# Altium PCB 220v-5v.PcbDoc
Units mm, origin at the board's own origin, x right, y up, seen from the top; angles counter-clockwise.
Board outline 48.03 x 13.67 mm, 2 copper layers (Top Layer, Bottom Layer); 15 components, 17 nets, 33 pads, 0 vias.
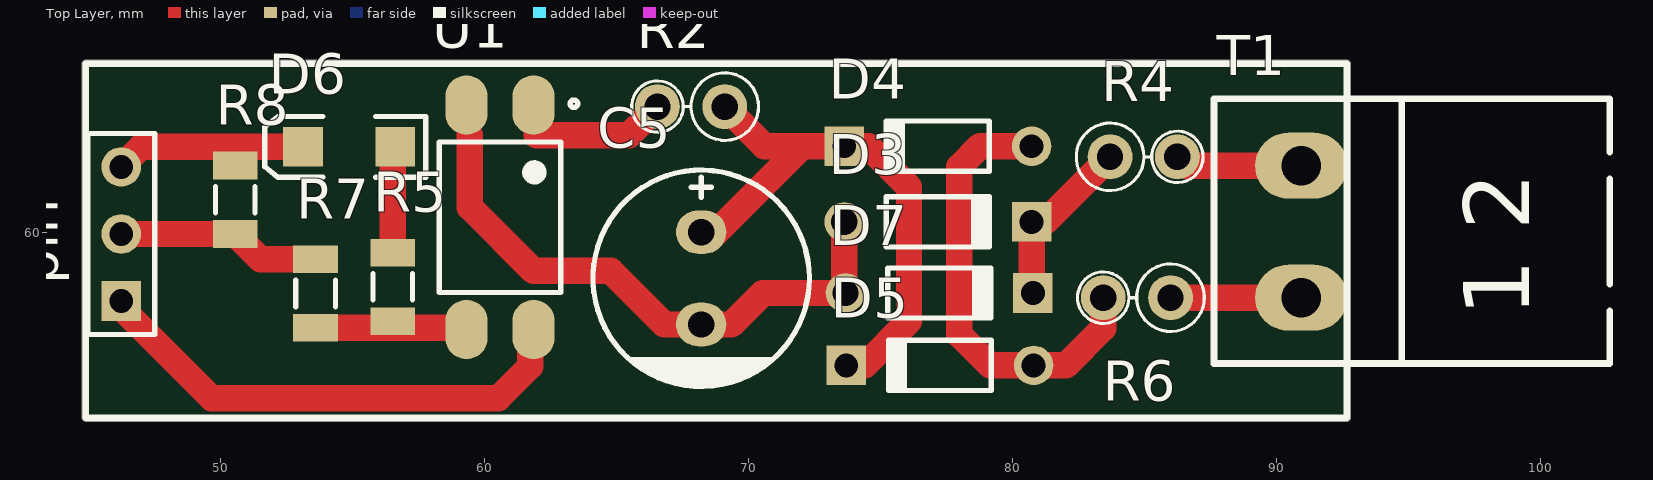
[diagram p0: Top Layer view]
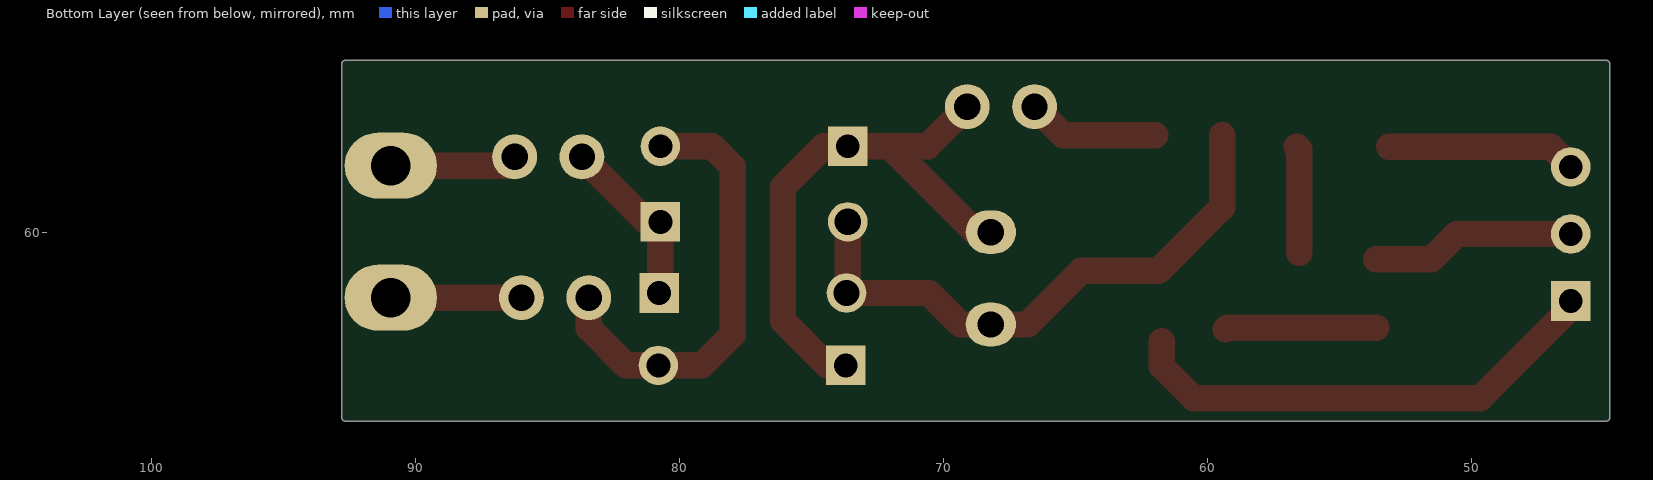
[diagram p1: Bottom Layer view, seen from below]
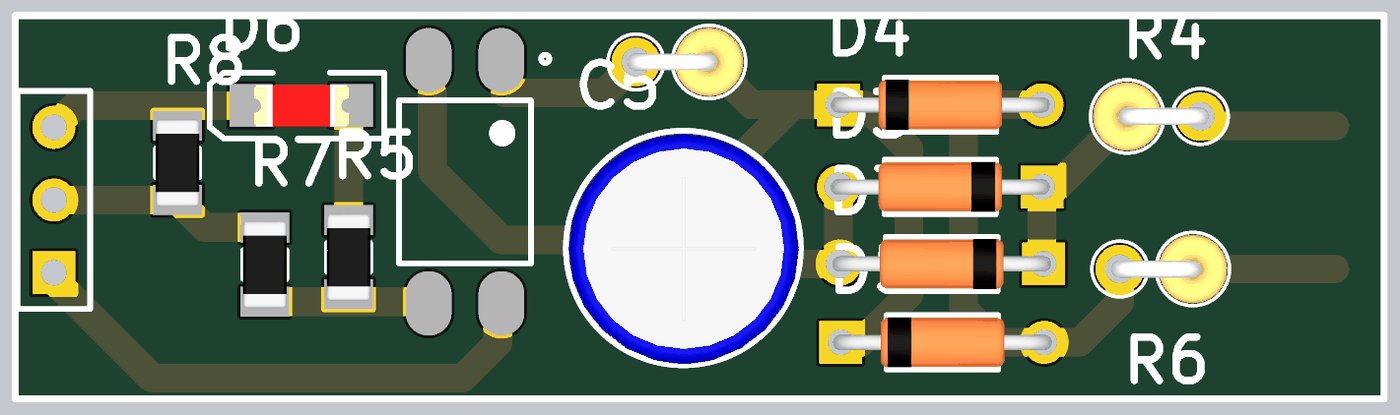
[diagram p2: 3D render of the assembled board from above, using the file's embedded part models]

## Layer stack, top to bottom
Top Solder: solder mask 0.0102, Solder Resist, Dk 3.5
Top Layer: signal copper 0.0356
Dielectric 1: dielectric 0.32, FR-4, Dk 4.8
Bottom Layer: signal copper 0.0356
Bottom Solder: solder mask 0.0102, Solder Resist, Dk 3.5

## Board outline
44.882,52.857 cw(c44.882,52.984) 44.754,52.984 44.754,66.396 cw(c44.882,66.396) 44.882,66.523 92.659,66.523 cw(c92.659,66.396) 92.787,66.396 92.787,52.984 cw(c92.659,52.984) 92.659,52.857

## Design rules (kind name [scope] priority, off if disabled: settings)
Clearance [All] p1: gap=0.254 ignorepadtopadclearanceinfootprint=FALSE except(0: Arc-Hole Track-Hole SMDPad-Hole THPad-Hole Via-Hole Fill-Hole Poly-Hole Region-Hole Text-Hole)
PolygonConnect [All] p1: connectstyle=Relief reliefconductorwidth=0.254 reliefentries=4 polygonreliefangle="90 Angle" airgapwidth=0.254
RoutingVias [All] p1: holewidth=0.711 width=1.27 viastyle="Through Hole" minholewidth=0.711 minwidth=1.27 maxholewidth=0.711 maxwidth=1.27
SolderMaskExpansion [All] p1: expansion=0.102
Width [All] p1: maxlimit=1 minlimit=0.4 preferedwidth=0.6
30 further rules are at their usual default settings.

## Components (designator, comment, footprint, x,y, rotation, side; value= is the part's Value field where it differs from the comment)
C5 "1uF" "cap 03" 68.199,58.265 r90 top
D3 "1N4148" DO-35#1 77.165,60.401 r0 top
D4 "1N4148" DO-35#2 77.165,63.271 r180 top
D5 "1N4148" DO-35#2 77.241,54.966 r180 top
D6 "SMD 1206 LED" "LED 1206" 54.864,63.246 r180 top
D7 "1N4148" DO-35#1 77.216,57.709 r0 top
pin "Comment" HDR1X3 46.228,57.404 r90 top
R2 "1K" "Axial 0_25w_2_54mm" 67.818,64.77 r180 top
R4 "1K" "Axial 0_25w_2_54mm" 84.963,62.865 r0 top
R5 "1K" "RES 1206 (3216X08L)" 56.515,56.642 r90 top
R6 "1K" "Axial 0_25w_2_54mm" 84.704,57.531 r180 top
R7 "1K" "RES 1206 (3216X08L)" 53.594,56.388 r90 top (schematic designator R5)
R8 "1K" "RES 1206 (3216X08L)" 50.546,59.944 r90 top (schematic designator R5)
T1 "Phoenix terminal" "phoenix terminal 2" 102.616,55.038 r90 top
U1 "PC817X2NIP0F" SOT254P975X400-4N 60.579,60.579 r270 top

## Footprints (in the part's own frame and the unit in brackets; to place one, negate y for a bottom-side part, rotate by r counter-clockwise, add the part's x,y. Pads: shape width x height; smd on the part's side, far side on the other; paste and mask are expansions set on the pad)
"Axial 0_25w_2_54mm" [mm] "Designer Abbas Basereh"
  round 1.7 hole 1: 1(1.275,0) 2(-1.275,0)
  silkscreen extent -2.56,-1.28 2.25,1.28, body extent -2.47,-1.2 1.57,1.2, height 9.4
"cap 03" [mm]
  oval 1.651x1.905 hole 1: 1(1.75,0) 2(-1.75,0)
  silkscreen extent -4.1,-4.1 4.1,4.1, body extent -4.05,-4.04 4,4.01, height 12.03
DO-35#1 [mm] "Diode, Axial; Body 3.8 x 1.9 mm (LxDia. max), Lead Dia. 0.53 mm (max)"
  round 1.5 hole 1: 1(-3.55,0)
  rect 1.5x1.5 hole 0.9: 2(3.55,0)
  silkscreen extent -1.95,-0.95 2.05,0.95, body extent -3.82,-0.87 3.82,0.87, height 1.89
DO-35#2 [mm] "Diode, Axial; Body 3.8 x 1.9 mm (LxDia. max), Lead Dia. 0.53 mm (max)"
  round 1.5 hole 0.9: 1(-3.55,0)
  rect 1.5x1.5 hole 0.9: 2(3.55,0)
  silkscreen extent -1.95,-0.95 2.05,0.95, body extent -3.82,-0.87 3.82,0.87, height 1.89
HDR1X3 [mm] "Connector; Header; 3 Position"
  rect 1.5x1.5 hole 0.9: 1(0,0)
  round 1.5 hole 0.9: 2(2.54,0) 3(5.08,0)
  silkscreen extent -1.27,-1.27 6.35,1.27
"LED 1206" [mm]
  rect 1.5x1.5 smd: 1(-1.75,0) 2(1.75,0)
  silkscreen extent -2.9,-1.15 3.2,1.15, body extent -1.65,-0.72 1.65,0.73, height 1.36
"phoenix terminal 2" [mm] "2 terminals"
  oval 2.5x3.5 hole 1.5: 1(2.493,11.684) 2(7.493,11.684)
  silkscreen extent 0,0 10.03,15
"RES 1206 (3216X08L)" [mm] "Chip Resistor, 2-Leads, Body 3.2x1.6mm, IPC High Density _ (0.125 W)"
  rect 1.05x1.7 smd: 1(0,0) 2(2.596,0)
  silkscreen extent 0.8,-0.75 1.8,0.75, body extent -0.23,-0.76 2.82,0.76, height 0.6
SOT254P975X400-4N [mm]
  oval 2.25x1.6 smd: 1(-4.25,1.27) 2(-4.25,-1.27) 3(4.25,-1.27) 4(4.25,1.27)
  silkscreen extent -4.44,-2.3 2.85,2.94

## Part data
C5: library part Cap-Polar, "Polar Capacitor", Voltage=16V, Adding Date=1387/12/20, Designer="Saeid Jorablo", Organazation=ControTec
D3 D4 D5 D7: library part "Diode 1N4148", "High Conductance Fast Diode", Code_JEDEC=DO-204-AH, ComponentLink1Description="Manufacturer Link", ComponentLink1URL=http://www.fairchildsemi.com/, ComponentLink2Description=Datasheet, ComponentLink2URL=http://www.fairchildsemi.com/ds/1N%2F1N4148.pdf, DatasheetVersion=1997, LatestRevisionDate=17-Jul-2002, LatestRevisionNote="Re-released for DXP Platform.", PackageDescription="Diode, Axial; Body 3.8 x 1.9 mm (LxDia. max), Lead Dia. 0.53 mm (max)", PackageReference=DO-35, Published=8-Jun-2000, Publisher="Altium Limited"
D6: library part "LED SMD 1206"
R2 R4 R6: library part "RES Axial 0.25W", "RES Axial 0.25W", Data=4-1-2017, Desc.="RES Axial 0.25W", Designer="Abbas Basereh"
R5 R7 R8: library part Resistor, "Resistor", Power="1/8 W", Tolerance=5%
T1: library part "Phoenix terminal 2", "Terminal 2 Pin", ComponentLinkURL=www.picpars.com, Designer="Seyed Mohsen Ghasemain", E-mail=picpars@gmail.com
U1: "Optoisolator Transistor Output 5000Vrms 1 Channel 4-SMD", Package="SMD-4 Sharp", Availability=Unavailable, MF="Sharp Microelectronics", MP=PC817X2NIP0F, Price=None, SnapEDA_Link=https://www.snapeda.com/parts/PC817X2NIP0F/Sharp%20Microelectronics/view-part/2874099/?ref=snap

## Nets (pads, with @x,y where several pads share a name; then routed paths per layer and width w, separated by ;. In a path a pad name is that pad's centre, name@x,y a point inside that pad or via, vN(x,y) a via of type N, cw(c..) or ccw(c..) an arc to the next point about the centre after c; other vN are vias at no path point)
220v: 
a: R4.1 T1.2 | length 5.3
  Top Layer w0.254: T1.2@90.598,62.865 T1.2
  Top Layer w1: R4.1 86.572,62.531 T1.2
b: R6.2 T1.1 | length 5
  Top Layer w1: R6.2 T1.1
c: D3.2 D7.2 R4.2 | length 6.7
  Top Layer w1: D7.2 80.715,57.76 D3.2 81.224,60.401 R4.2
d: D4.1 D5.1 R6.1 | length 17.1
  Top Layer w1: D4.1 78.765,63.271 77.978,62.484 77.978,56.134 79.146,54.966 D5.1 82.017,54.966 83.429,56.378 R6.1
e: C5.2 D3.1 D7.1 U1.2 | length 22
  Top Layer w1: 59.436,63.686 59.436,60.96 61.849,58.547 64.77,58.547 66.802,56.515 C5.2 69.342,56.515 70.536,57.709 D7.1 73.615,57.76 D3.1
f: C5.1 D4.2 D5.2 R2.2 | length 21.6
  Top Layer w1: C5.1 68.778,60.015 72.034,63.271 ; R2.2 70.592,63.271 72.034,63.271 ; D5.2 74.397,54.966 76.073,56.642 76.073,61.722 74.524,63.271 D4.2 72.034,63.271
g: R2.1 U1.1 | length 5
  Top Layer w1: 61.976,63.686 65.459,63.686 R2.1
gnd: D6.2 pin.3 R8.2 | length 7.2
  Top Layer w1: pin.3 46.99,63.246 D6.2
h: R5.1 R7.1 U1.3 | length 5.7
  Top Layer w1: R7.1 59.25,56.388 U1.3
j: 
k: 
l: D6.1 R5.2 | length 4
  Top Layer w1: R5.2 56.515,63.147 D6.1
m: 
n: 
out: pin.2 R7.2 R8.1 | length 7.8
  Top Layer w1: pin.2 R8.1 51.506,58.984 R7.2
vcc: pin.1 U1.4 | length 18.6
  Top Layer w1: pin.1 46.228,57.15 49.657,53.721 60.511,53.721 61.722,54.932 U1.4@61.722,55.88

## Silkscreen, mask and mechanical layers (free items; w line width, h text height)
Top Overlay:
  lines w0.254: 44.882,52.984 92.659,52.984 92.659,66.396 44.882,66.396 44.882,52.984

## Text inside footprints (layer, text, board x,y; h text height)
T1: Top Overlay "1 2" at 99.568,56.816 h2.5 r90